# EAGLE board FinalBoard_FrankensToy_FabAcademy2014_ADLL (EAGLE 6.5.0)
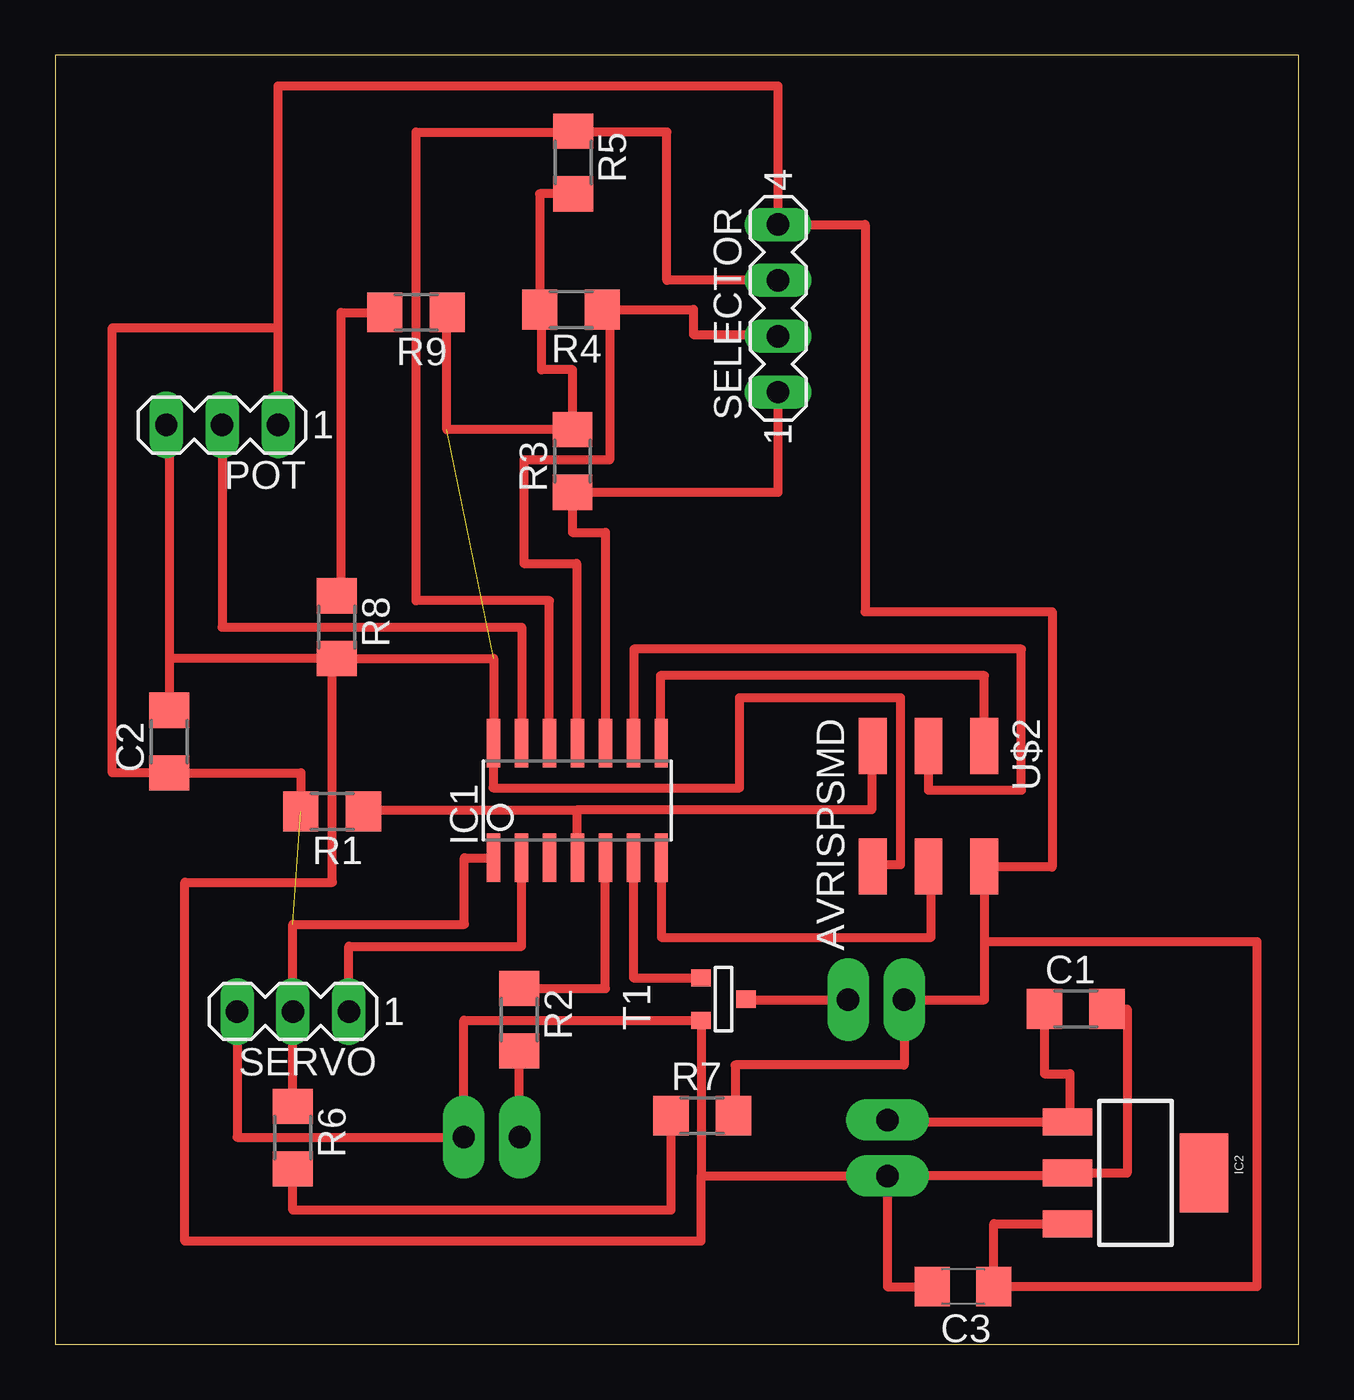
[diagram p0: board, top side]

Size 56.5 x 58.6 mm. Coordinates in mm from the lower left corner, seen from the top.
Outline: 0,0 56.5,0 56.5,58.6 0,58.6 0,0
Copper layers (1*16): Top 0.035mm / dielectric 1.5mm / Bottom 0.035mm
Design rules "default *": minimum track width 10mil, minimum drill 24mil, track to track 16mil, track to pad 16mil, pad to pad 16mil, via to via 16mil, smd to smd 0mil, copper to edge 40mil, drill to drill 8mil, minimum pad ring 10mil, minimum via ring 8mil, stop-mask expansion 4mil, vias tented up to drill 0mil, thermal gap 10mil

## Footprints (pad centres in the part's own frame; a part is rotated, then mirrored left to right if it is on the bottom)
1206 = smd 1.6 x 1.803: 1 -1.422,0; 2 1.422,0
C1206 = smd 1.6 x 1.8: 1 -1.4,0; 2 1.4,0
SOIC14 = smd 0.61 x 2.21: 1 -3.81,-2.603; 2 -2.54,-2.603; 3 -1.27,-2.603; 4 0,-2.603; 5 1.27,-2.603; 6 2.54,-2.603; 7 3.81,-2.603; 8 3.81,2.603; 9 2.54,2.603; 10 1.27,2.603; 11 0,2.603; 12 -1.27,2.603; 13 -2.54,2.603; 14 -3.81,2.603
SOT223 = smd 3.6 x 2.2: GNDLG 0,3.099 | smd 1.219 x 2.235: GNDSM 0,-3.099; IN -2.311,-3.099; OUT 2.311,-3.099
1X02_LONGPADS = drill 1.016 pad 1.88 long: 1 0,0; 2 2.54,0
MA03-1 = drill 1.016 long: 1 -2.54,0; 2 0,0; 3 2.54,0
R1206 = smd 1.6 x 1.803: 1 -1.422,0; 2 1.422,0
MA04-1 = drill 1.016 long: 1 -3.81,0; 2 -1.27,0; 3 1.27,0; 4 3.81,0
SOT-23 = smd 0.787 x 0.889: 1 0.025,-1.016; 2 -0.94,1.016; 3 0.991,1.016
2X03SMD = smd 2.54 x 1.27: 1 -2.54,2.54; 2 2.92,2.54; 3 -2.54,0; 4 2.92,0; 5 -2.54,-2.54; 6 2.92,-2.54

## Placement (x,y rotation side)
C1  .47uf  [1206]  46.37,15.25 0 top
C2  1uf  [1206]  5.19,27.4 90 top
C3  22uf  [C1206]  41.25,2.63 180 top
IC1  ATTINY44-SSU  [SOIC14]  23.73,24.72 0 top
IC2  [SOT223]  49.09,7.8 270 top
LED  [1X02_LONGPADS]  21.11,9.42 180 top
POT  [MA03-1]  7.59,41.79 180 top
POWER  [1X02_LONGPADS]  37.81,7.66 90 top
R1  10k  [R1206]  12.59,24.22 180 top
R2  499  [1206]  21.09,14.76 270 top
R3  10k  [R1206]  23.51,40.15 90 top
R4  10k  [R1206]  23.44,47.03 180 top
R5  10k  [R1206]  23.54,53.71 270 top
R6  0k  [1206]  10.8,9.4 270 top
R7  0k  [1206]  29.4,10.4 0 top
R8  0k  [1206]  12.8,32.6 270 top
R9  0k  [1206]  16.4,46.9 180 top
SELECTOR  [MA04-1]  32.85,47.09 90 top
SERVO  [MA03-1]  10.81,15.13 180 top
SPEAK  [1X02_LONGPADS]  36.03,15.67 0 top
T1  [SOT-23]  30.37,15.67 90 top
U$2  AVRISPSMD  [2X03SMD]  39.68,24.65 270 top

## Library data of the parts
C1 C2 R2 R6-R9 = 01_FAB_Hello
C3 = rcl
IC1 U$2 = fab
IC2 = 01_ale
LED POWER SPEAK = 01_SparkFun
POT SELECTOR SERVO = con-lstb; OC_FARNELL: unknown; OC_NEWARK: unknown
R1 R3-R5 = resistor
T1 = 01_fab

## Nets
5V: C2.1 C3.1 IC1.1 IC2.OUT POT.1 R1.2 R6.1 R7.2 SELECTOR.4 SERVO.2 SPEAK.2 U$2.2
GND: C1.2 C2.2 C3.2 IC1.14 IC2.GNDSM LED.2 POT.3 POWER.1 R3.2 R4.2 R5.2 R8.2 SERVO.3 T1.2 U$2.6
MISO: IC1.8 U$2.1
MOSI: IC1.7 U$2.4
N$1: IC1.5 R2.1
N$2: SPEAK.1 T1.1
N$3: R6.2 R7.1
N$4: LED.1 R2.2
N$5: R8.1 R9.2
N$6: R9.1
PINSPEAK: IC1.6 T1.3
RST: IC1.4 R1.1 U$2.5
SCK: IC1.9 U$2.3
SEL1: IC1.10 R3.1 SELECTOR.1
SEL2: IC1.11 R4.1 SELECTOR.2
SEL3: IC1.12 R5.1 SELECTOR.3
SERVO: IC1.2 SERVO.1
TX: IC1.13 POT.2
VCC: C1.1 IC2.IN POWER.2

## Tracks (layer width: path | path; a pad name or v marks a point on that pad's centre or on a via)
5V  (1 unrouted)
  Top 0.406: 42.22,21.7 45.3,21.7 45.3,33.3 36.8,33.3 36.8,50.9 SELECTOR.4 32.85,57.2 10.13,57.2 10.13,46.2 | 42.22,21.7 U$2.2 | 42.22,21.7 42.22,18.3 | 42.22,18.3 42.22,15.67 SPEAK.2 38.57,12.7 30.9,12.7 30.9,10.4 R7.2 | IC1.1 18.6,22.12 18.6,19.1 10.81,19.1 SERVO.2 R6.1 | 42.22,18.3 54.6,18.3 54.6,2.63 C3.1 42.65,5.49 IC2.OUT | POT.1 10.13,46.2 | 10.13,46.2 2.6,46.2 2.6,25.98 C2.1 11.17,25.98 R1.2
GND  (1 unrouted)
  Top 0.406: POWER.1 37.81,2.63 C3.2 | POWER.1 45.99,7.66 IC2.GNDSM 48.7,7.8 48.7,15.25 C1.2 | R5.2 22.02,52.29 R4.2 22.1,47.03 22.1,44.3 23.51,44.3 R3.2 17.8,41.57 17.8,47 | U$2.6 37.14,21.8 38.4,21.8 38.4,29.4 31.1,29.4 31.1,25.3 19.9,25.3 19.9,27.32 IC1.14 19.92,31.18 R8.2 12.6,31.18 | 29.35,7.66 T1.2 18.57,14.73 LED.2 8.27,9.42 SERVO.3 | 12.6,31.18 12.6,21 5.9,21 5.9,4.7 29.35,4.7 29.35,7.66 | 29.35,7.66 POWER.1 | POT.3 5.19,41.79 5.19,31.18 | 5.19,31.18 C2.2 | 12.6,31.18 5.19,31.18
MISO
  Top 0.406: U$2.1 42.22,30.4 27.5,30.4 27.5,27.32 IC1.8
MOSI
  Top 0.406: IC1.7 27.54,18.5 39.8,18.5 39.8,21.73 U$2.4
N$1
  Top 0.406: IC1.5 25,16.18 R2.1
N$2
  Top 0.406: T1.1 31.39,15.67 SPEAK.1
N$3
  Top 0.406: R6.2 10.8,6.1 27.7,6.1 27.88,6.1 27.98,6.1 R7.1
N$4
  Top 0.406: 21.11,13.54 R2.2 21.09,9.42 LED.1
N$5
  Top 0.406: 14.98,46.7 R9.2 13,46.9 13,34.02 R8.1
PINSPEAK
  Top 0.406: IC1.6 26.27,16.66 T1.3
RST
  Top 0.406: U$2.5 37.1,27.19 37.1,24.3 23.73,24.3 | IC1.4 23.73,24.3 | R1.1 14.01,24.3 23.73,24.3
SCK
  Top 0.406: U$2.3 39.68,25.2 43.9,25.2 43.9,31.6 26.3,31.6 26.3,27.32 IC1.9
SEL1
  Top 0.406: SELECTOR.1 32.85,38.73 R3.1 23.5,36.9 25,36.9 IC1.10
SEL2
  Top 0.406: SELECTOR.2 32.85,45.9 29,45.9 29,47.03 R4.1 25.2,47.03 25.2,40.2 21.3,40.2 21.3,35.5 23.7,35.5 23.7,27.32 IC1.11
SEL3
  Top 0.406: 23.54,55.1 27.8,55.1 27.8,48.36 SELECTOR.3 | IC1.12 22.46,33.8 16.4,33.8 16.4,55.1 23.54,55.1 | 23.54,55.1 R5.1
SERVO
  Top 0.406: SERVO.1 13.35,18.1 21.2,18.1 IC1.2
TX
  Top 0.406: POT.2 7.59,32.6 21.2,32.6 IC1.13
VCC
  Top 0.406: 45.99,10.2 IC2.IN | POWER.2 37.81,10.11 IC2.IN | C1.1 44.95,12.3 46.1,12.3 46.1,10.11 IC2.IN